# Altium PCB PCB1.PcbDoc
Units mm, origin at the board's own origin, x right, y up, seen from the top; angles counter-clockwise.
Board outline 37.08 x 45.47 mm, 2 copper layers (Top Layer, Bottom Layer); 5 components, 36 nets, 79 pads, 0 vias.
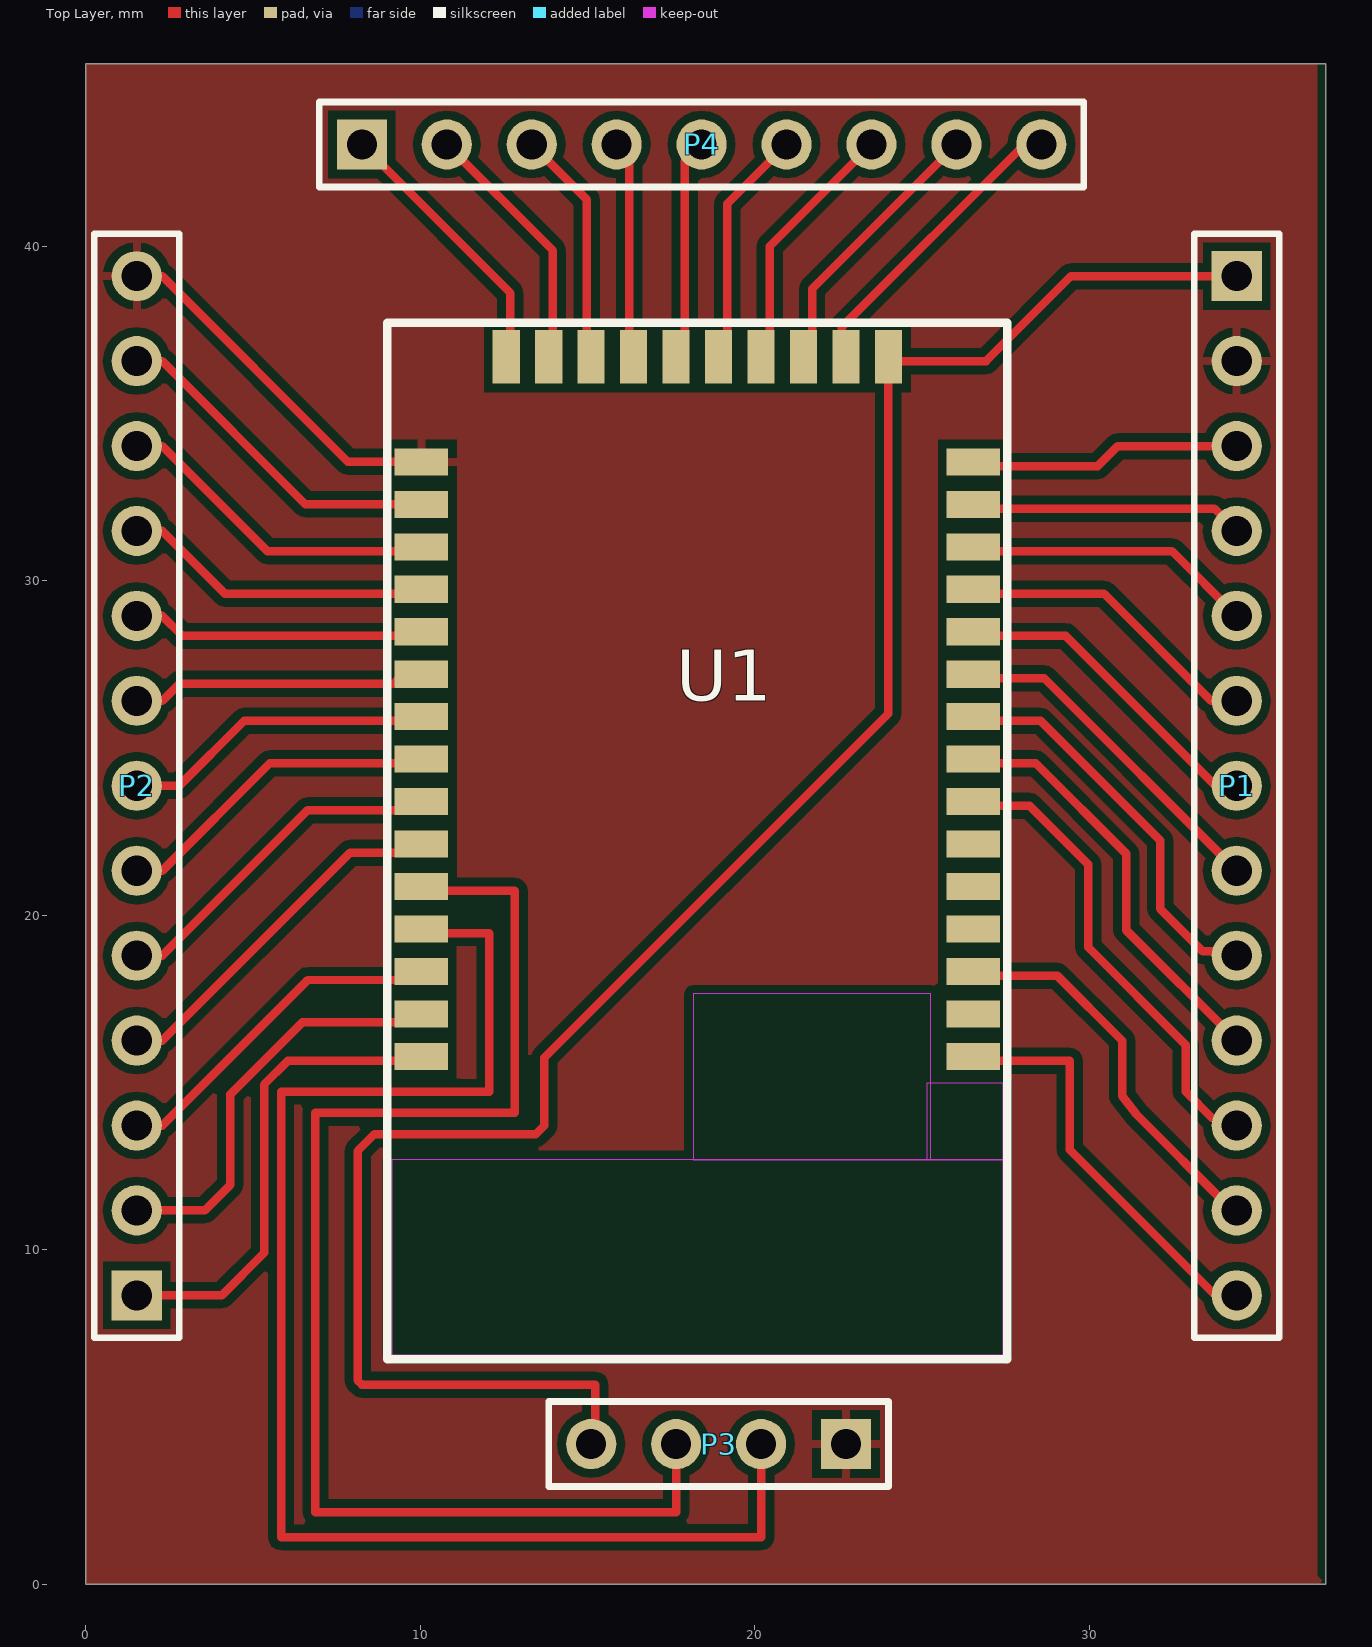
[diagram p0: Top Layer view]
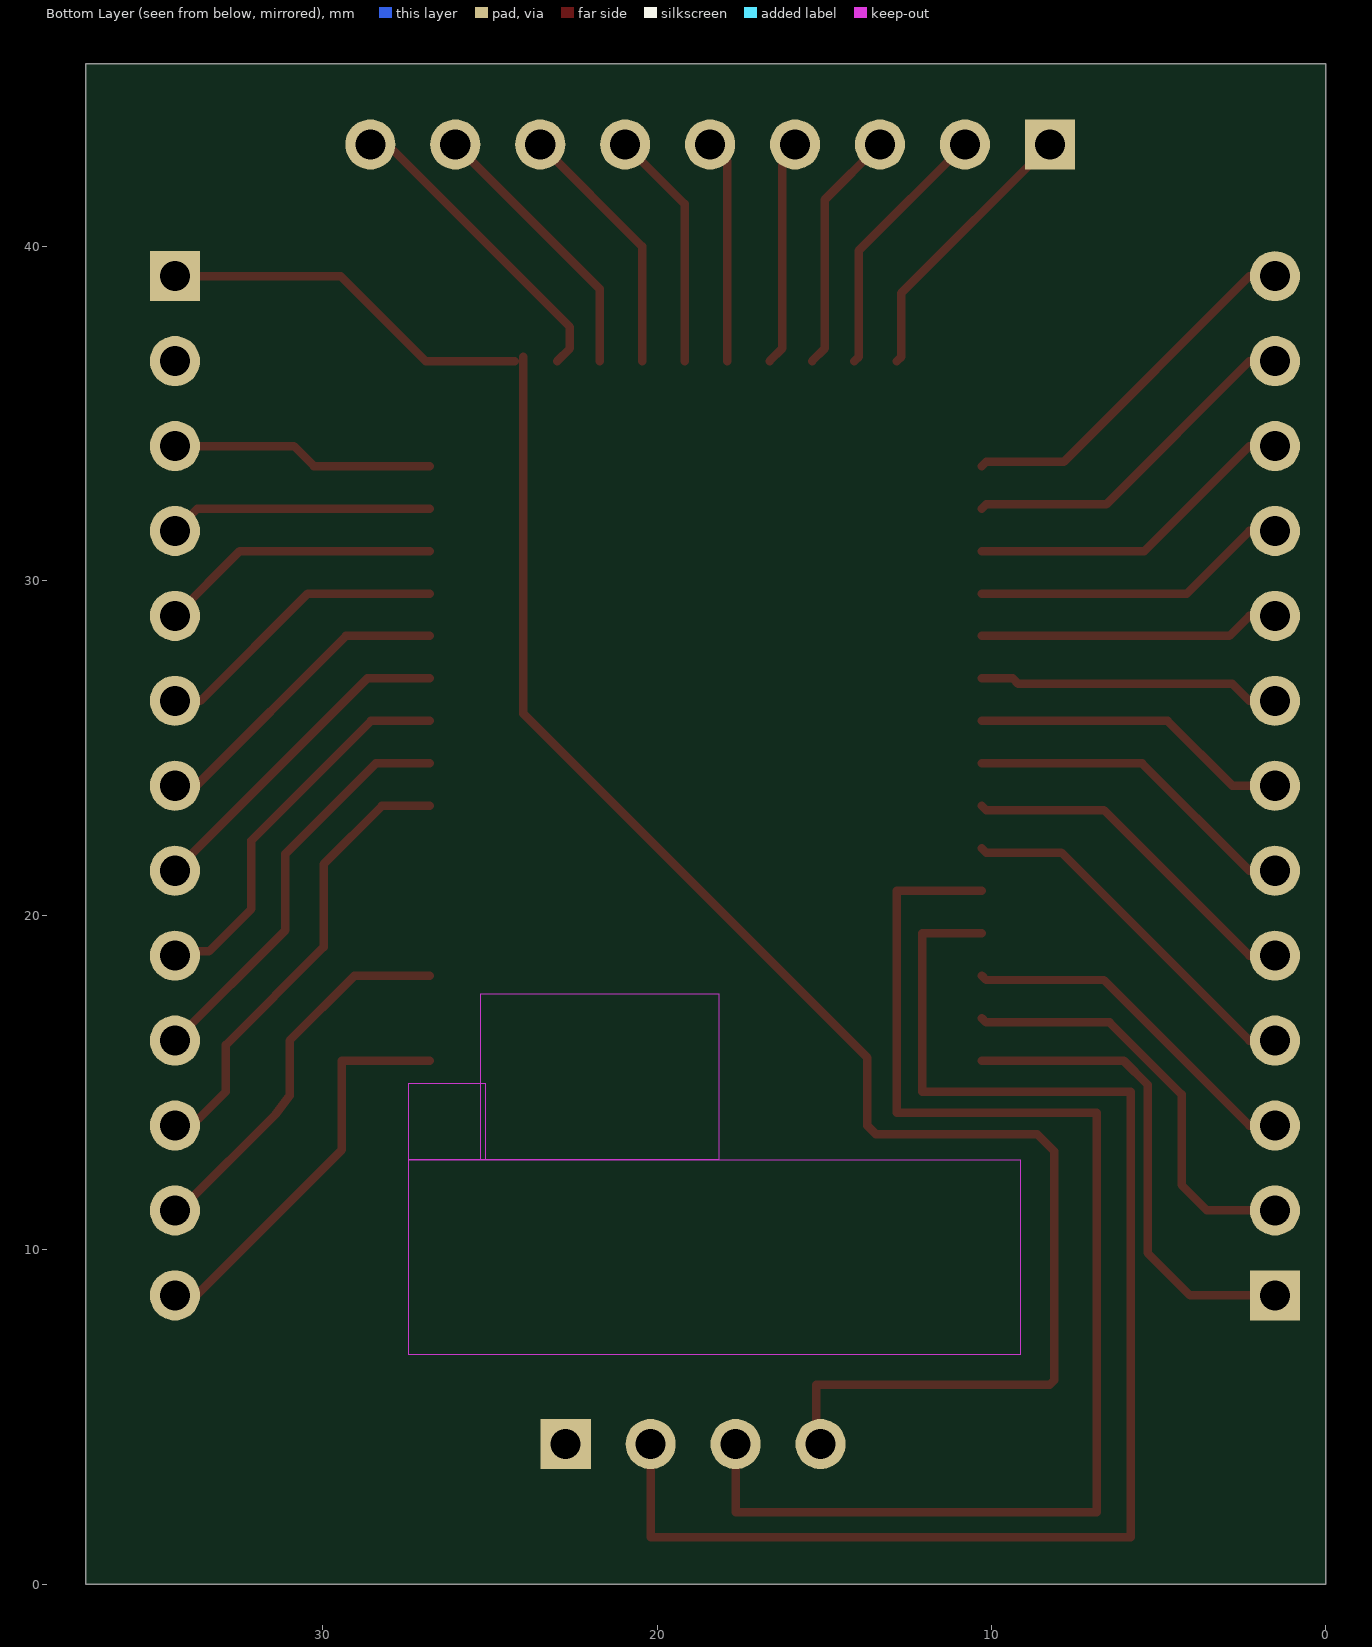
[diagram p1: Bottom Layer view, seen from below]

## Layer stack, top to bottom
Top Solder: solder mask 0.0102, Solder Resist, Dk 3.5
Top Layer: signal copper 0.0356
Dielectric 1: dielectric 0.32, FR-4, Dk 4.8
Bottom Layer: signal copper 0.0356
Bottom Solder: solder mask 0.0102, Solder Resist, Dk 3.5

## Board outline
0,0 37.084,0 37.084,45.466 0,45.466

## Design rules (kind name [scope] priority, off if disabled: settings)
Clearance [All] p1: gap=0.254
PolygonConnect [All] p1: connectstyle=Relief reliefconductorwidth=0.254 reliefentries=4 polygonreliefangle="90 Angle" airgapwidth=0.254
RoutingVias [All] p1: holewidth=0.711 width=1.27 viastyle="Through Hole" minholewidth=0.711 minwidth=1.27 maxholewidth=0.711 maxwidth=1.27
SolderMaskExpansion [All] p1: expansion=0.102
Width [All] p1: maxlimit=0.254 minlimit=0.254 preferedwidth=0.254
30 further rules are at their usual default settings.

## Components (designator, comment, footprint, x,y, rotation, side; value= is the part's Value field where it differs from the comment)
P1 "Header 13" HDR1X13 34.417,39.116 r270 top
P2 "Header 13" HDR1X13 1.524,8.636 r90 top
P3 "Header 4" HDR1X4 22.733,4.191 r180 top
P4 "Header 9" HDR1X9 8.255,43.053 r0 top
U1 "nRF51-01/02" nRF51-01/02 10.16,6.858 r0 top

## Footprints (in the part's own frame and the unit in brackets; to place one, negate y for a bottom-side part, rotate by r counter-clockwise, add the part's x,y. Pads: shape width x height; smd on the part's side, far side on the other; paste and mask are expansions set on the pad)
HDR1X4 [mm] "Connector; Header; 4 Position"
  rect 1.5x1.5 hole 0.9: 1(0,0)
  round 1.5 hole 0.9: 2(2.54,0) 3(5.08,0) 4(7.62,0)
  silkscreen extent -1.27,-1.27 8.89,1.27
HDR1X9 [mm] "Connector; Header; 9 Position"
  rect 1.5x1.5 hole 0.9: 1(0,0)
  round 1.5 hole 0.9: 2(2.54,0) 3(5.08,0) 4(7.62,0) 5(10.16,0) 6(12.7,0) 7(15.24,0) 8(17.78,0) 9(20.32,0)
  silkscreen extent -1.27,-1.27 21.59,1.27
HDR1X13 [mm] "Connector; Header; 13 Position"
  rect 1.5x1.5 hole 0.9: 1(0,0)
  round 1.5 hole 0.9: 2(2.54,0) 3(5.08,0) 4(7.62,0) 5(10.16,0) 6(12.7,0) 7(15.24,0) 8(17.78,0) 9(20.32,0) 10(22.86,0) 11(25.4,0) 12(27.94,0) 13(30.48,0)
  silkscreen extent -1.27,-1.27 31.75,1.27
nRF51-01/02 [mm]
  rect 0.81x1.6 smd: 1(13.843,29.845) 2(12.573,29.845) 3(11.303,29.845) 4(10.033,29.845) 5(8.763,29.845) 6(7.493,29.845) 7(6.223,29.845) 8(4.953,29.845) 9(3.683,29.845) 10(2.413,29.845)
  rect 1.6x0.81 smd: 11(-0.127,26.704) 12(-0.127,25.434) 13(-0.127,24.164) 14(-0.127,22.894) 15(-0.127,21.624) 16(-0.127,20.354) 17(-0.127,19.084) 18(-0.127,17.814) 19(-0.127,16.544) 20(-0.127,15.274) 21(-0.127,14.004) 22(-0.127,12.734) 23(-0.127,11.464) 24(-0.127,10.194) 25(-0.127,8.924) 26(16.383,8.924) 27(16.383,10.194) 28(16.383,11.464) 29(16.383,12.734) 30(16.383,14.004) 31(16.383,15.274) 32(16.383,16.544) 33(16.383,17.814) 34(16.383,19.084) 35(16.383,20.354) 36(16.383,21.624) 37(16.383,22.894) 38(16.383,24.164) 39(16.383,25.434) 40(16.383,26.704)
  Keep-Out Layer region: -1.016,0 17.272,0 17.272,5.842 -1.016,5.842
  Keep-Out Layer region: 8.001,5.842 15.113,5.842 15.113,10.795 8.001,10.795
  Keep-Out Layer region: 14.986,5.842 17.272,5.842 17.272,8.128 14.986,8.128
  silkscreen extent -1.14,-0.13 17.4,30.86

## Part data
P1 P2: "Header, 13-Pin"
P3: "Header, 4-Pin"
P4: "Header, 9-Pin"
U1: "Bluetooth uController"

## Nets (pads, with @x,y where several pads share a name; then routed paths per layer and width w, separated by ;. In a path a pad name is that pad's centre, name@x,y a point inside that pad or via, vN(x,y) a via of type N, cw(c..) or ccw(c..) an arc to the next point about the centre after c; other vN are vias at no path point)
GND: P1.2 P2.13 P3.1 U1.11 | length 10.4
  Top Layer w0.254: 2.286,39.116 7.84,33.562 10.16,33.562 U1.11@10.287,33.435
NetP1_3: P1.3 U1.40 | length 7.9
  Top Layer w0.254: U1.40@26.797,33.435 30.26,33.435 30.861,34.036 P1.3
NetP1_4: P1.4 U1.39 | length 7.9
  Top Layer w0.254: U1.39@26.797,32.165 33.748,32.165 P1.4
NetP1_5: P1.5 U1.38 | length 8.4
  Top Layer w0.254: U1.38@26.797,30.895 32.478,30.895 P1.5
NetP1_6: P1.6 U1.37 | length 8.9
  Top Layer w0.254: U1.37@26.797,29.625 30.446,29.625 33.655,26.416 P1.6
NetP1_7: P1.7 U1.36 | length 9.5
  Top Layer w0.254: U1.36@26.797,28.355 29.303,28.355 33.782,23.876 P1.7
NetP1_8: P1.8 U1.35 | length 10
  Top Layer w0.254: U1.35@26.797,27.085 28.668,27.085 P1.8
NetP1_9: P1.9 U1.34 | length 11.7
  Top Layer w0.254: U1.34@26.797,25.815 28.556,25.815 32.131,22.24 32.131,20.193 33.401,18.923 34.036,18.923 34.163,18.796 P1.9
NetP1_10: P1.10 U1.33 | length 12.4
  Top Layer w0.254: U1.33@26.797,24.545 28.414,24.545 31.115,21.844 31.115,19.558 P1.10
NetP1_11: P1.11 U1.32 | length 13.9
  Top Layer w0.254: U1.32@26.797,23.275 28.228,23.275 29.972,21.531 29.972,19.05 32.893,16.129 32.893,14.732 33.695,13.93 33.949,13.93 34.163,13.716 P1.11
NetP1_12: P1.12 U1.28 | length 11.6
  Top Layer w0.254: U1.28@26.797,18.195 29.049,18.195 30.988,16.256 30.988,14.605 31.401,14.065 34.163,11.303 P1.12@34.163,10.922
NetP1_13: P1.13 U1.26 | length 12.1
  Top Layer w0.254: U1.26@26.797,15.655 29.43,15.655 29.43,12.988 33.782,8.636 P1.13
NetP2_1: P2.1 U1.25 | length 13.9
  Top Layer w0.254: 2.286,8.636 4.064,8.636 5.334,9.906 5.334,14.942 6.047,15.655 U1.25@10.287,15.655
NetP2_2: P2.2 U1.24 | length 12
  Top Layer w0.254: 2.286,11.176 3.556,11.176 4.318,11.938 4.318,14.645 6.471,16.798 10.16,16.798 U1.24@10.287,16.925
NetP2_3: P2.3 U1.23 | length 9.9
  Top Layer w0.254: 2.286,13.716 6.638,18.068 10.16,18.068 U1.23@10.287,18.195
NetP2_4: P2.4 U1.20 | length 10.4
  Top Layer w0.254: 2.286,16.256 7.908,21.878 10.16,21.878 U1.20@10.287,22.005
NetP2_5: P2.5 U1.19 | length 9.9
  Top Layer w0.254: 2.286,18.796 6.638,23.148 10.16,23.148 U1.19@10.287,23.275
NetP2_6: P2.6 U1.18 | length 9.3
  Top Layer w0.254: 2.286,21.336 5.495,24.545 U1.18@10.287,24.545
NetP2_7: P2.7 U1.17 | length 8.8
  Top Layer w0.254: 2.286,23.876 2.794,23.876 4.733,25.815 U1.17@10.287,25.815
NetP2_8: P2.8 U1.16 | length 8.3
  Top Layer w0.254: 2.286,26.416 2.794,26.924 9.199,26.924 9.36,27.085 U1.16@10.287,27.085
NetP2_9: P2.9 U1.15 | length 8.2
  Top Layer w0.254: 2.286,28.956 2.887,28.355 U1.15@10.287,28.355
NetP2_10: P2.10 U1.14 | length 8.8
  Top Layer w0.254: 2.286,31.496 4.157,29.625 U1.14@10.287,29.625
NetP2_11: P2.11 U1.13 | length 9.3
  Top Layer w0.254: 2.286,34.036 5.427,30.895 U1.13@10.287,30.895
NetP2_12: P2.12 U1.12 | length 9.8
  Top Layer w0.254: 2.286,36.576 6.57,32.292 10.16,32.292 U1.12@10.287,32.165
NetP3_2: P3.2 U1.22 | length 43.2
  Top Layer w0.254: U1.22@10.287,19.465 12.065,19.465 12.065,14.732 5.842,14.732 5.842,1.397 20.193,1.397 P3.2
NetP3_3: P3.3 U1.21 | length 39.9
  Top Layer w0.254: U1.21@10.287,20.735 12.827,20.735 12.827,14.097 6.858,14.097 6.858,2.159 17.653,2.159 P3.3
NetP4_1: P4.1 U1.10 | length 8.4
  Top Layer w0.254: P4.1 12.7,38.608 12.7,36.703 U1.10@12.827,36.576
NetP4_2: P4.2 U1.9 | length 7.8
  Top Layer w0.254: P4.2 13.97,39.878 13.97,36.703 U1.9@14.097,36.576
NetP4_3: P4.3 U1.8 | length 7.3
  Top Layer w0.254: P4.3 14.986,41.402 14.986,36.957 U1.8@15.367,36.576
NetP4_4: P4.4 U1.7 | length 6.8
  Top Layer w0.254: P4.4 16.256,42.672 16.256,36.957 U1.7@16.637,36.576
NetP4_5: P4.5 U1.6 | length 6.7
  Top Layer w0.254: U1.6@17.907,36.576 17.907,42.545 P4.5
NetP4_6: P4.6 U1.5 | length 7.2
  Top Layer w0.254: U1.5@19.177,36.576 19.177,41.275 P4.6
NetP4_7: P4.7 U1.4 | length 7.7
  Top Layer w0.254: U1.4@20.447,36.576 20.447,40.005 P4.7
NetP4_8: P4.8 U1.3 | length 8.3
  Top Layer w0.254: U1.3@21.717,36.576 21.717,38.735 P4.8
NetP4_9: P4.9 U1.2 | length 9.4
  Top Layer w0.254: U1.2@22.987,36.576 22.606,36.957 22.606,37.592 28.067,43.053 P4.9
VCC: P1.1 P3.4 U1.1 | length 60.2
  Top Layer w0.254: P3.4@15.24,4.191 15.24,5.969 8.255,5.969 8.128,6.096 8.128,12.954 8.636,13.462 13.462,13.462 13.716,13.716 13.716,15.748 24.003,26.035 U1.1 ; U1.1@24.257,36.576 26.924,36.576 29.464,39.116 P1.1
pads on no net: U1.27 U1.29 U1.30 U1.31

## Polygon pours and split planes (outlines as drawn)
GND on Top Layer "GND_L01_P006" (solid, pour order 6): 0,0 37.084,0 36.83,0.254 36.83,45.466 0,45.466